# EAGLE board driverMotor (tugas nanang) (EAGLE 7.5.0)
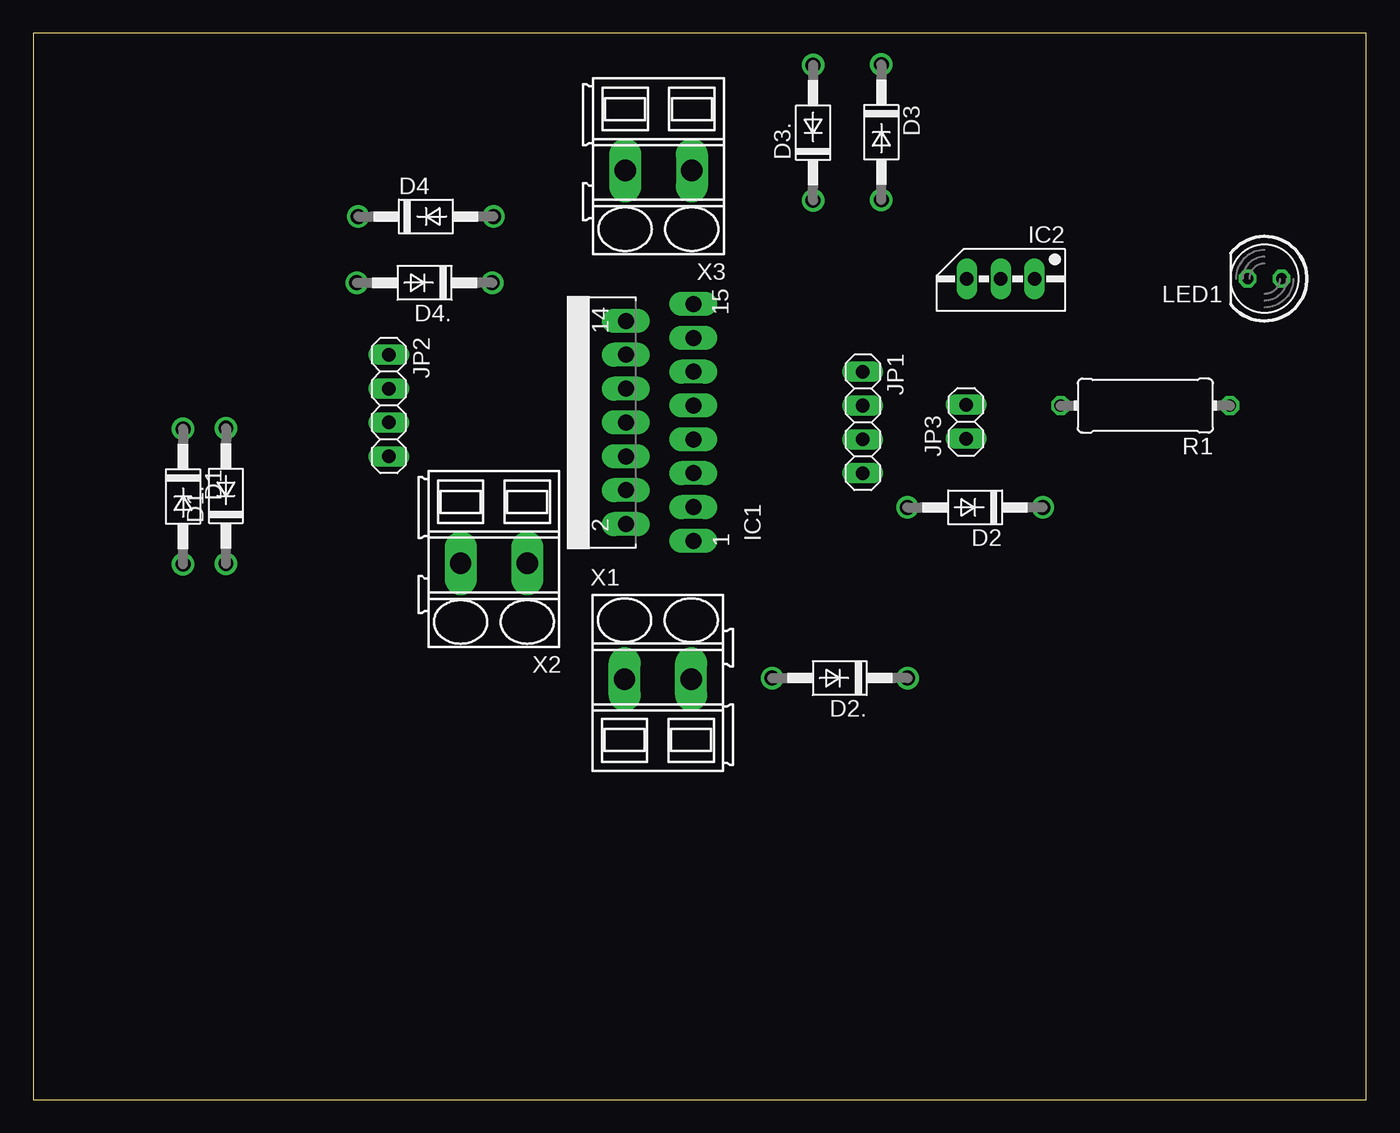
[diagram p0: board, top side]
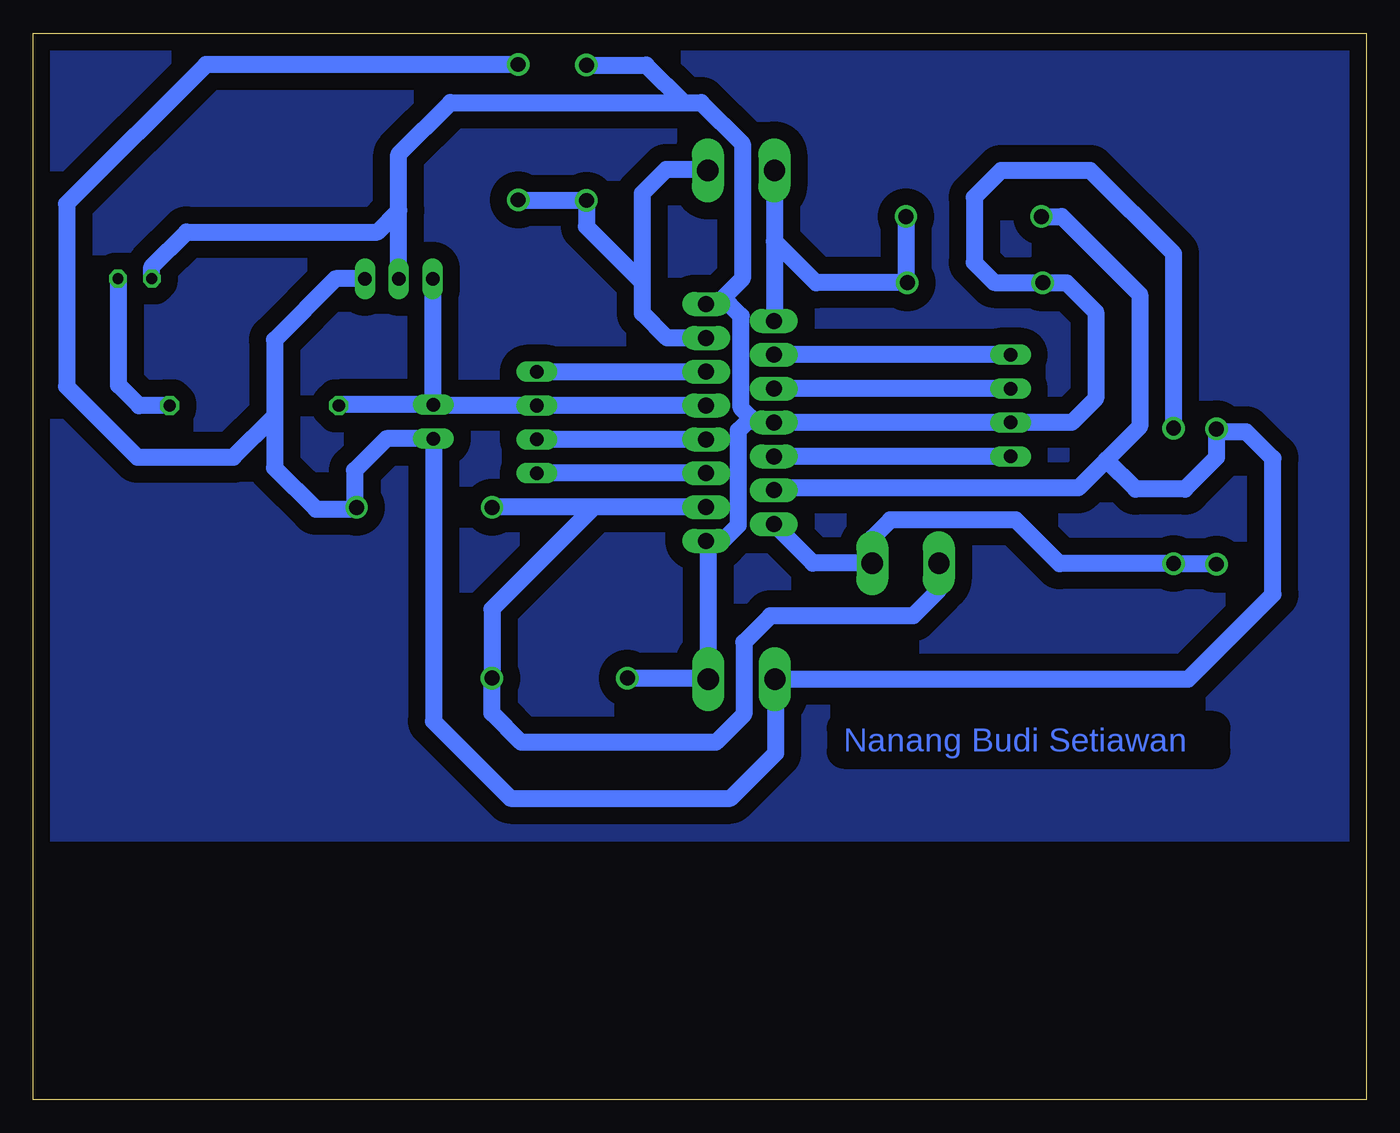
[diagram p1: board, bottom side, seen from below]

Size 100 x 80 mm. Coordinates in mm from the lower left corner, seen from the top.
Outline: 0,0 100,0 100,80 0,80 0,0
Copper layers (1*16): Top 0.035mm / dielectric 1.5mm / Bottom 0.035mm
Design rules "default": minimum track width 10mil, minimum drill 24mil, track to track 8mil, track to pad 8mil, pad to pad 8mil, via to via 8mil, smd to smd 8mil, copper to edge 40mil, drill to drill 8mil, minimum pad ring 10mil, minimum via ring 8mil, stop-mask expansion 4mil, vias tented up to drill 0mil, thermal gap 10mil

## Footprints (pad centres in the part's own frame; a part is rotated, then mirrored left to right if it is on the bottom)
DO41-10 = drill 1.118: A 5.08,0; C -5.08,0
MULTIWATT-15 = drill 1.2 long: 1 -8.89,-7.62; 2 -7.62,-2.54; 3 -6.35,-7.62; 4 -5.08,-2.54; 5 -3.81,-7.62; 6 -2.54,-2.54; 7 -1.27,-7.62; 8 0,-2.54; 9 1.27,-7.62; 10 2.54,-2.54; 11 3.81,-7.62; 12 5.08,-2.54; 13 6.35,-7.62; 14 7.62,-2.54; 15 8.89,-7.62
78MXXS = drill 1.016 long: GND 0,-2.54; IN -2.54,-2.54; OUT 2.54,-2.54
1X04 = drill 1.016 long: 1 -3.81,0; 2 -1.27,0; 3 1.27,0; 4 3.81,0
1X02 = drill 1.016 long: 1 -1.27,0; 2 1.27,0
LED5MM = drill 0.813 octagon: A -1.27,0; K 1.27,0
0411/12 = drill 0.914 octagon: 1 -6.35,0; 2 6.35,0
SMKDSP_1,5/2 = drill 1.6 pad 1.8 long: 1 -2.5,0; 2 2.5,0

## Placement (x,y rotation side)
D1  1N4004  [DO41-10]  11.23,45.24 270 top
D1.  1N4004  [DO41-10]  14.45,45.29 90 top
D2  1N4004  [DO41-10]  70.66,44.43 180 top
D2.  1N4004  [DO41-10]  60.51,31.62 180 top
D3  1N4004  [DO41-10]  63.62,72.58 270 top
D3.  1N4004  [DO41-10]  58.5,72.54 90 top
D4  1N4004  [DO41-10]  29.45,66.25 0 top
D4.  1N4004  [DO41-10]  29.35,61.28 180 top
IC1  L298  [MULTIWATT-15]  41.91,50.8 90 top
IC2  [78MXXS]  72.58,59.04 180 top
JP1  [1X04]  62.23,50.8 270 top
JP2  [1X04]  26.67,52.07 270 top
JP3  [1X02]  69.98,50.86 90 top
LED1  [LED5MM]  92.38,61.59 180 top
R1  [0411/12]  83.43,52.06 180 top
X1  SMKDSP_1,5/2  [SMKDSP_1,5/2]  46.86,31.55 0 top
X2  SMKDSP_1,5/2  [SMKDSP_1,5/2]  34.56,40.25 180 top
X3  SMKDSP_1,5/2  [SMKDSP_1,5/2]  46.9,69.72 180 top

## Library data of the parts
D1 D1. D2 D2. D3 D3. D4 D4. = diode
IC1 = st-microelectronics
IC2 = v-reg
JP1-JP3 = pinhead
LED1 = led
R1 = resistor
X1-X3 = con-phoenix-smkdsp; MF: FARNELL; MPN: 1733570; OC_FARNELL: 3041244; OC_NEWARK: 69C8588

## Nets
+5V: IC1.9 IC2.OUT JP1.2 JP3.2 R1.2
ENABLE_A: IC1.6 JP2.4
ENABLE_B: IC1.11 JP1.1
GND: D1..A D2..A D3..A D4..A IC1.1 IC1.8 IC1.15 IC2.GND JP2.3 LED1.K X1.2
INPUT1: IC1.5 JP1.4
INPUT2: IC1.7 JP1.3
INPUT3: IC1.10 JP2.2
INPUT4: IC1.12 JP2.1
LED: LED1.A R1.1
MOTOR1_1: D1..C D1.A IC1.2 X2.1
MOTOR1_2: D2..C D2.A IC1.3 X2.2
MOTOR2_1: D3..C D3.A IC1.13 X3.1
MOTOR2_2: D4..C D4.A IC1.14 X3.2
VS: D1.C D2.C D3.C D4.C IC1.4 IC2.IN JP3.1 X1.1

## Tracks (layer width: path | path; a pad name or v marks a point on that pad's centre or on a via)
+5V
  Bottom 1.27: IC1.9 JP1.2 69.92,52.07 JP3.2 | IC2.OUT 70.04,52.19 JP3.2 | JP3.2 77.01,52.13 R1.2
ENABLE_A
  Bottom 1.27: JP2.4 IC1.6
ENABLE_B
  Bottom 1.27: JP1.1 IC1.11
GND
  Bottom 1.27: 46.15,51.15 45.8,50.8 IC1.8 JP2.3 22.1,50.8 20.3,52.6 20.3,59.1 22.48,61.28 D4..A 24.29,61.3 27.9,61.3 29.4,62.8 29.4,67.7 27.4,69.7 20.7,69.7 14.45,63.45 D1..A | 46.15,51.15 46.9,51.9 46.9,58.8 47.8,59.7 48.7,59.7 | 48.7,59.7 IC1.15 | 46.15,51.15 47.1,50.2 47.1,43.1 48.29,41.91 IC1.1 49.36,41.74 X1.2 49.43,31.62 D2..A | IC2.GND 72.58,66.7 | 72.58,66.7 72.58,70.92 68.7,74.8 51.2,74.8 | 51.2,74.8 49.9,74.8 46.8,71.7 46.8,61.6 48.7,59.7 | LED1.K 91.11,62.49 88.5,65.1 74.18,65.1 72.58,66.7 | D3..A 54.02,77.62 51.2,74.8
INPUT1
  Bottom 1.27: IC1.5 JP1.4
INPUT2
  Bottom 1.27: IC1.7 JP1.3
INPUT3
  Bottom 1.27: JP2.2 IC1.10
INPUT4
  Bottom 1.27: JP2.1 IC1.12
LED
  Bottom 1.27: R1.1 92.06,52.06 93.6,53.6 93.6,61.54 LED1.A
MOTOR1_1
  Bottom 1.27: IC1.2 41.52,40.25 X2.1 37.1,40.29 37.1,42.1 35.7,43.5 26.3,43.5 23.01,40.21 D1..C 11.28,40.21 D1.A
MOTOR1_2
  Bottom 1.27: D2.A 65.56,44.45 IC1.3 57.95,44.45 65.6,36.8 D2..C 65.6,29 63.4,26.8 48.8,26.8 46.7,28.9 46.7,34.3 44.7,36.3 34,36.3 32.06,38.24 X2.2
MOTOR2_1
  Bottom 1.27: IC1.13 52.45,57.15 54.3,59 54.3,61.3 | 54.3,61.3 54.3,68 52.5,69.8 49.48,69.8 X3.1 | D3.A 58.54,67.5 D3..C 58.5,65.5 54.3,61.3
MOTOR2_2
  Bottom 1.27: X3.2 44.4,64.4 | 44.4,64.4 44.4,58.47 IC1.14 | D4.A 34.53,61.38 D4..C 41.28,61.28 44.4,64.4
N$1
  pour Bottom (isolate 1.27): 0,80 100,80 100,20 0,20
VS
  Bottom 1.27: D4.C 22.85,66.25 17,60.4 17,50.5 19.5,48 | 19.5,48 21.6,45.9 44.27,45.9 IC1.4 | 19.5,48 17.3,45.8 13.6,45.8 11.23,48.17 D1.C 11.01,50.1 9,50.1 7,48.1 7,37.9 13.35,31.55 X1.1 44.3,31.49 44.3,26 47.7,22.6 64.2,22.6 69.98,28.38 JP3.1 73.51,49.59 75.9,47.2 75.9,44.59 D2.C 75.87,44.3 78.8,44.3 81.9,47.4 81.9,51.3 | IC2.IN 77.32,61.58 81.9,57 81.9,51.3 | D3.C 87.04,77.66 97.5,67.2 97.5,53.5 92.2,48.2 85,48.2 81.9,51.3

## Text on the board
Bottom: Nanang Budi Setiawan